# Altium PCB line_follower.PcbDoc
Units mm, origin at the board's own origin, x right, y up, seen from the top; angles counter-clockwise.
Board outline 30 x 15 mm, 2 copper layers (Top Layer, Bottom Layer); 9 components, 6 nets, 32 pads, 5 vias.
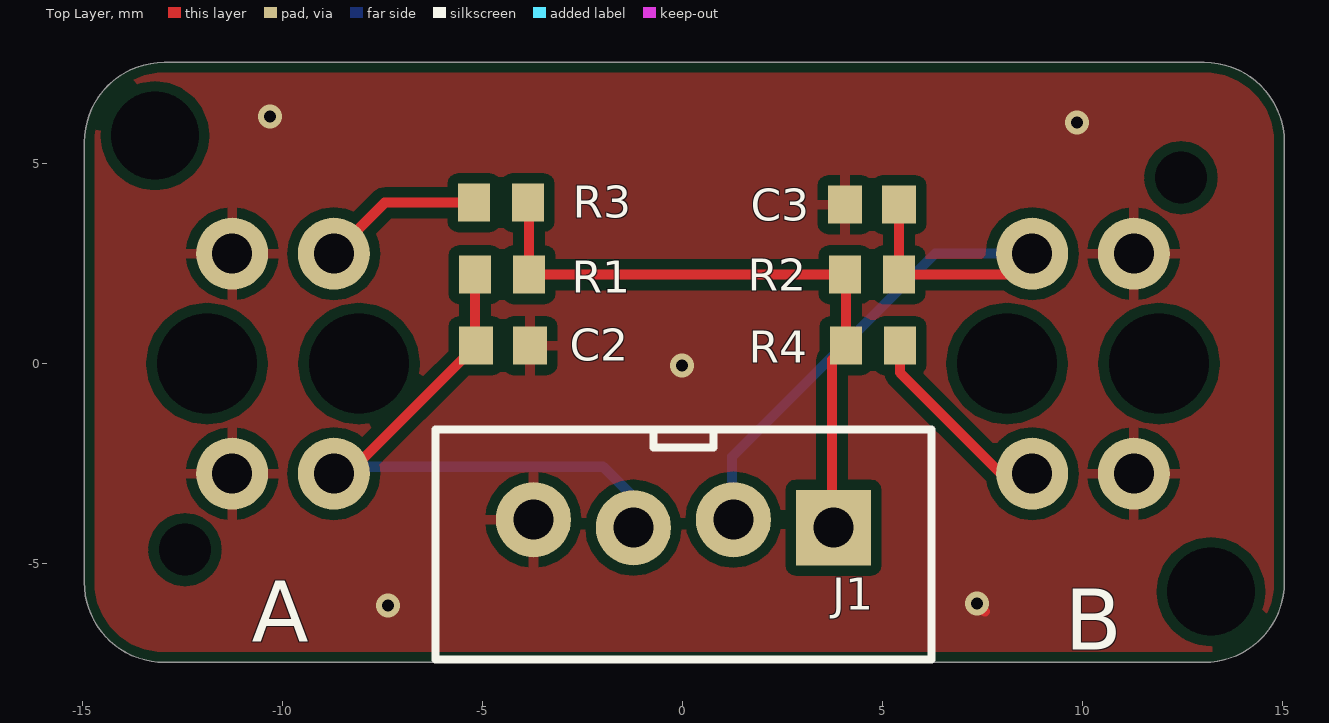
[diagram p0: Top Layer view]
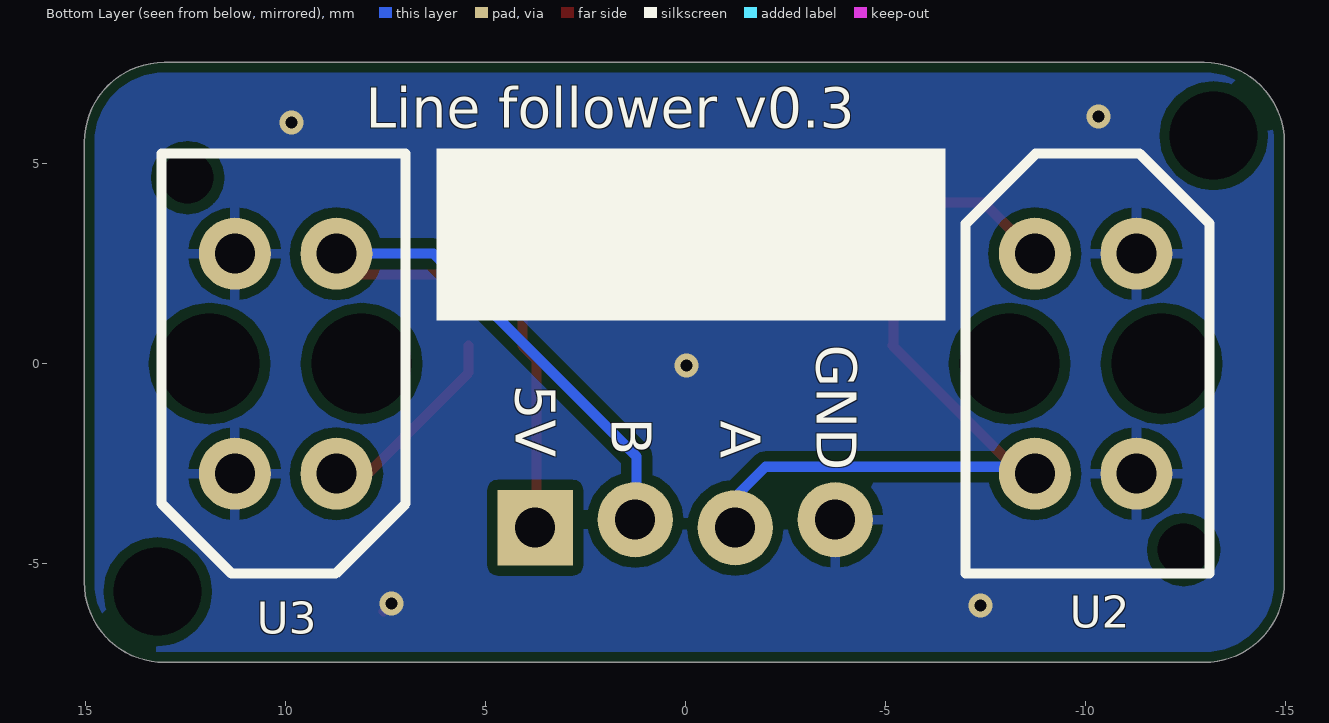
[diagram p1: Bottom Layer view, seen from below]
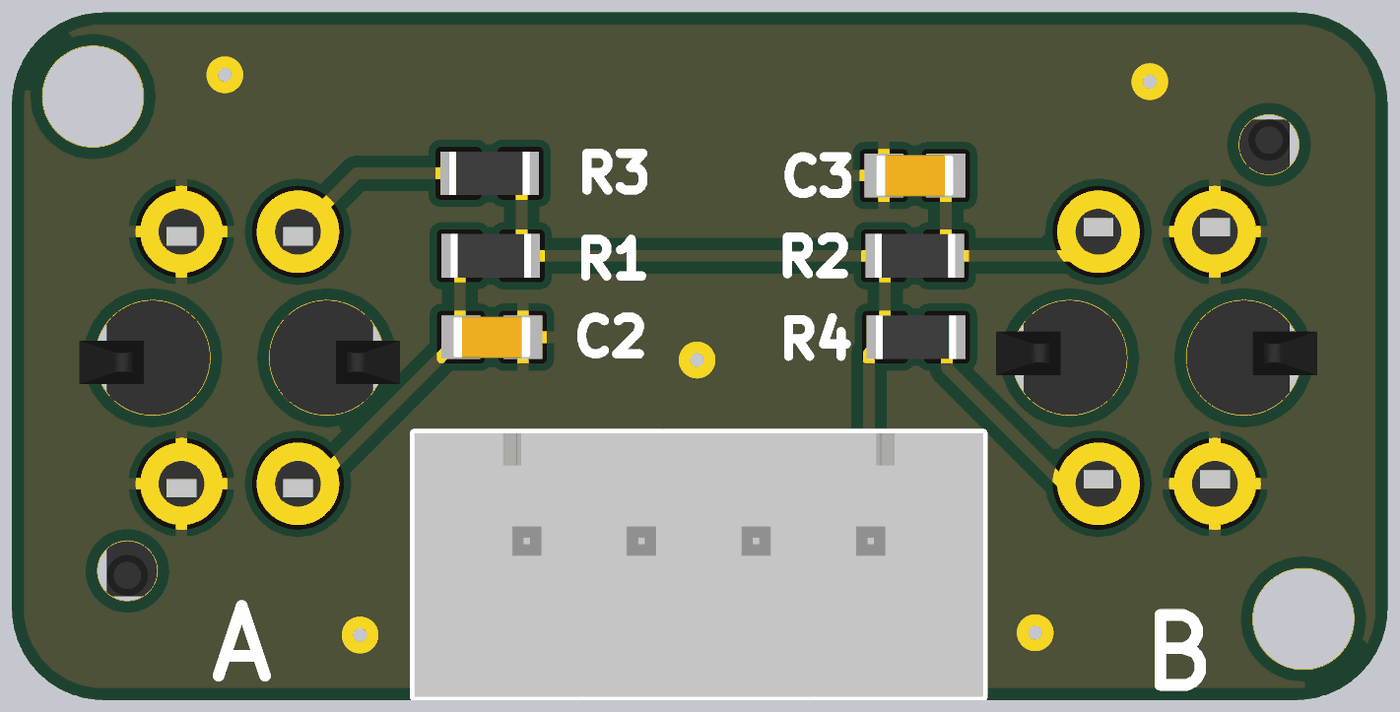
[diagram p2: 3D render of the assembled board from above, using the file's embedded part models]

## Layer stack, top to bottom
Top Solder: solder mask 0.0102, Solder Resist, Dk 3.5
Top Layer: signal copper 0.0356
Dielectric 1: dielectric 0.32, FR-4, Dk 4.8
Bottom Layer: signal copper 0.0356
Bottom Solder: solder mask 0.0102, Solder Resist, Dk 3.5

## Board outline
-14.967,-5.467 -14.967,5.533 cw(c-12.967,5.533) -12.967,7.533 13.033,7.533 cw(c13.033,5.533) 15.033,5.533 15.033,-5.467 cw(c13.033,-5.467) 13.033,-7.467 -12.967,-7.467 cw(c-12.967,-5.467)

## Design rules (kind name [scope] priority, off if disabled: settings)
BoardOutlineClearance [All] p1: gap=0.254 ignorepadtopadclearanceinfootprint=FALSE except(0: Arc-SplitContinuation Track-SplitContinuation SMDPad-SplitContinuation THPad-SplitContinuation Via-SplitContinuation Fill-SplitContinuation Poly-SplitContinuation Region-SplitContinuation Text-SplitContinuation)
Clearance [All] p1: gap=0.254 ignorepadtopadclearanceinfootprint=FALSE except(0: Arc-Hole Track-Hole SMDPad-Hole THPad-Hole Via-Hole Fill-Hole Poly-Hole Region-Hole Text-Hole)
PolygonConnect [All] p1: thpad.connectstyle=Relief thpad.reliefconductorwidth=0.254 thpad.reliefentries=4 thpad.polygonreliefangle="90 Angle" thpad.airgapwidth=0.254 smdpad.connectstyle=Relief smdpad.reliefconductorwidth=0.254 smdpad.reliefentries=4 smdpad.polygonreliefangle="90 Angle" smdpad.airgapwidth=0.254 via.connectstyle=Direct via.reliefconductorwidth=0.254 via.reliefentries=4 via.polygonreliefangle="90 Angle" via.airgapwidth=0.254
RoutingVias [All] p1: holewidth=0.3 width=0.6 viastyle="Through Hole" minholewidth=0.3 minwidth=0.6 maxholewidth=0.3 maxwidth=0.6
SolderMaskExpansion SolderMaskExpansion_1 [IsVia] p1: expansion=0 soldermaskfromhole=TRUE
SolderMaskExpansion [All] p2: expansion=0.102
Width [All] p1: maxlimit=0.254 minlimit=0.254 preferedwidth=0.254
30 further rules are at their usual default settings.

## Components (designator, comment, footprint, x,y, rotation, side; value= is the part's Value field where it differs from the comment)
C2 "C" C0603 -4.5,0.45 r180 top value=100nF
C3 "C" C0603 4.725,3.975 r0 top value=100nF
J1 "CONN_4P" "JST B4B-XH-A" 3.762,-4 r180 top
R1 "R" R0603 -4.525,2.225 r0 top value=10k
R2 "R" R0603 4.725,2.225 r180 top value=10k
R3 "R" R0603 -4.55,4.025 r0 top value=150R
R4 "R" R0603 4.75,0.45 r180 top value=150R
U2 "TCRT5000" TCRT5000 -10,0 r90 bottom locked
U3 "TCRT5000" TCRT5000 10,0 r270 bottom locked

## Footprints (in the part's own frame and the unit in brackets; to place one, negate y for a bottom-side part, rotate by r counter-clockwise, add the part's x,y. Pads: shape width x height; smd on the part's side, far side on the other; paste and mask are expansions set on the pad)
C0603 [mm] "Chip Capacitor, 2-Leads, Body 1.60x0.80mm, IPC Medium Density"
  rect 0.85x0.95 smd: 1(-0.675,0) 2(0.675,0)
  body extent -0.85,-0.45 0.85,0.45, height 0.6
"JST B4B-XH-A" [mm] "4 PIN LOCKING HEADER 2.5mm PITCH"
  rect 1.88x1.88 hole 1: 1(0,0.1)
  round 1.88 hole 1: 2(2.5,-0.1) 3(5,0.1) 4(7.5,-0.1)
  silkscreen extent -2.45,-2.35 9.95,3.4, body extent -2.45,-2.35 9.95,3.4, height 7
R0603 [mm]
  rect 0.8x0.95 smd: 1(-0.675,0) 2(0.675,0)
  body extent -0.87,-0.48 0.87,0.48, height 0.45
TCRT5000 [mm] "Reflective Optical Sensor with Transistor Output"
  round 0 hole 1.3: 0(-4.65,-2.45)
  round 0 hole 2.5: 0(0,-1.9) 0(0,1.9)
  round 1.8 hole 1: 1(2.75,1.27) 2(2.75,-1.27) 3(-2.75,-1.27) 4(-2.75,1.27)
  silkscreen extent -5.25,-3.1 5.25,3, body extent -5.2,-3.5 5,3.5, height 7.02

## Part data
C2 C3: "Ceramic Capacitor SMD"
J1: "Connector, 4P"
R1 R2 R3 R4: "Resistor SMD"
U2 U3: "Reflective Optical Sensor with Transistor Output"

## Free pads (board coordinates)
  round 1.524 hole 2.2: 3(-13.2,5.7) 3(13.2,-5.7)

## Via types
v1: diameter 0.6, hole 0.3, Top Layer to Bottom Layer, 5 vias

## Nets (pads, with @x,y where several pads share a name; then routed paths per layer and width w, separated by ;. In a path a pad name is that pad's centre, name@x,y a point inside that pad or via, vN(x,y) a via of type N, cw(c..) or ccw(c..) an arc to the next point about the centre after c; other vN are vias at no path point)
5V: J1.1 R1.2 R2.2 R3.2 R4.2 | length 16.2
  Top Layer w0.254: R3.2 -3.85,4 R1.2 R2.2 4.075,2.2 R4.2 3.725,0.1 J1.1@3.725,-4.1
Ana_A: C2.2 J1.3 R1.1 U2.4 | length 15.9
  Top Layer w0.254: U2.4 -8.375,-2.75 C2.2 -5.2,0.475 R1.1
  Bottom Layer w0.254: U2.4 -8.73,-2.579 -1.996,-2.579 -0.6,-3.975 J1.3@-0.6,-4.325
Ana_B: C3.2 J1.2 R2.1 U3.4 | length 16.5
  Top Layer w0.254: C3.2 R2.1 8.205,2.225 U3.4
  Bottom Layer w0.254: J1.2@1.225,-3.9 1.225,-2.325 6.3,2.75 U3.4
GND: C2.1 C3.1 J1.4 U2.2 U2.3 U3.2 U3.3 | length 0.3
  Top Layer w0.254: v1(7.35,-6) v1@7.55,-6.2
  other v1: -7.375,-6.05 -0.025,-0.05 9.85,6.025 -10.325,6.175
NetR3_1: R3.1 U2.1 | length 4
  Top Layer w0.254: U2.1 -7.455,4.025 R3.1
NetR4_1: R4.1 U3.1 | length 5.2
  Top Layer w0.254: R4.1 5.425,-0.225 7.95,-2.75 U3.1
  Bottom Layer w0.254: U3.1@8.543,-2.75 U3.1
pads on no net: U2.0 U3.0

## Polygon pours and split planes (outlines as drawn)
GND on Top Layer "GND_L01_P007" (solid, pour order 7): -14.967,-5.467 -14.967,5.533 cw(c-12.967,5.533) -12.967,7.533 13.033,7.533 cw(c13.033,5.533) 15.033,5.533 15.033,-5.467 cw(c13.033,-5.467) 13.033,-7.467 -12.967,-7.467 cw(c-12.967,-5.467)
GND on Bottom Layer "GND_L02_P008" (solid, pour order 8): -14.967,-5.467 -14.967,5.533 cw(c-12.967,5.533) -12.967,7.533 13.033,7.533 cw(c13.033,5.533) 15.033,5.533 15.033,-5.467 cw(c13.033,-5.467) 13.033,-7.467 -12.967,-7.467 cw(c-12.967,-5.467)

## Silkscreen, mask and mechanical layers (free items; w line width, h text height)
Top Overlay:
  text "A" at -10.775,-6.95 h1.52
  text "B" at 9.55,-7.15 h1.52
Bottom Overlay:
  rectangle: -6.5,1.075 6.225,5.375
  text "Line follower v0.3" at 12.15,27.45 h1
  text "Line follower v0.3" at 11.7,25.35 h1
  text "Line follower v0.3" at 8,5.9 h1
  text "GND" at -3.275,0.475 h1 r90
  text "5V" at 4.25,-0.525 h1 r90
  text "B" at 1.85,-1.35 h1 r90
  text "A" at -0.875,-1.425 h1 r90
Mechanical 1:
  the board outline again, w0.013